# EAGLE board LEDDriver_v_5 (EAGLE 6.4)
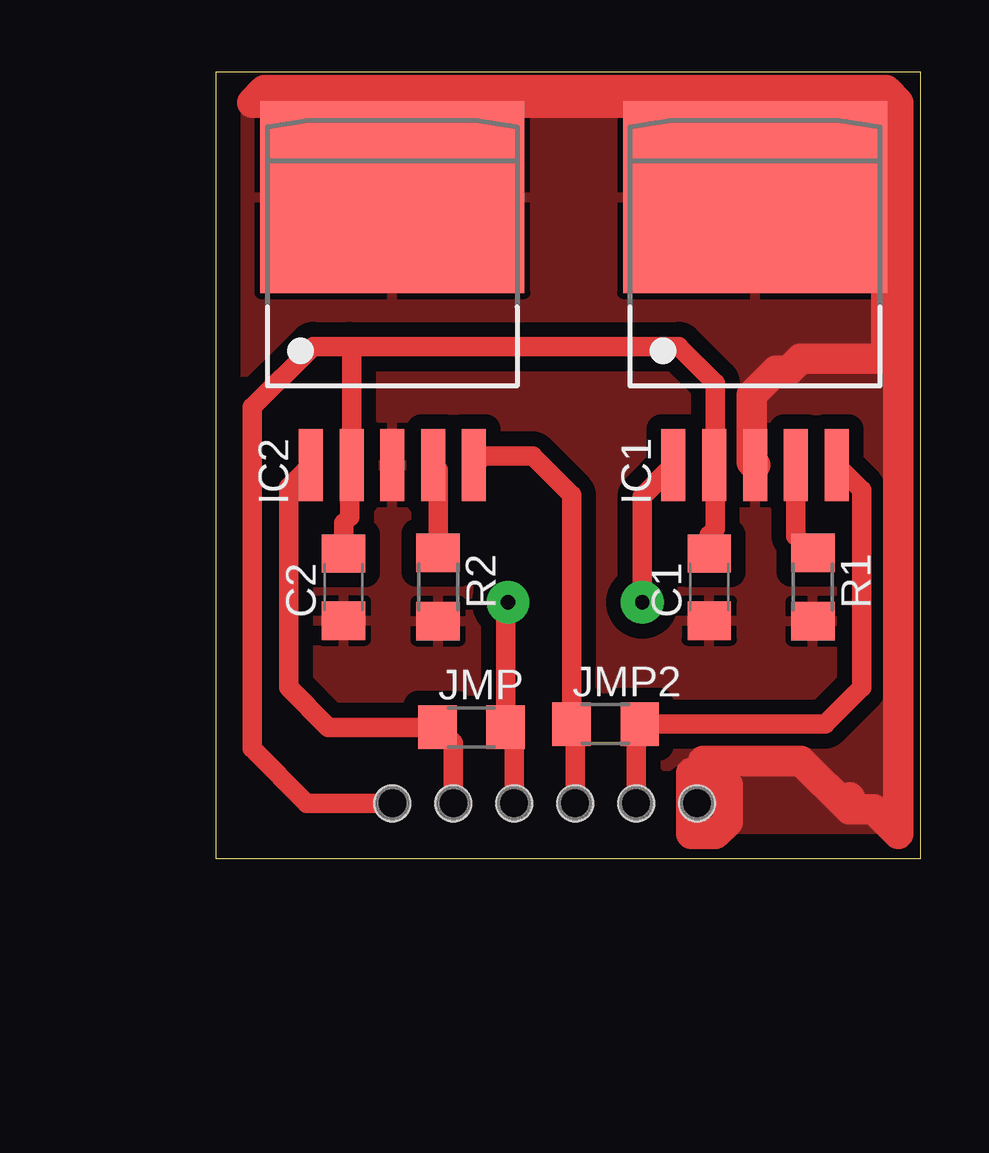
[diagram p0: board, top side]
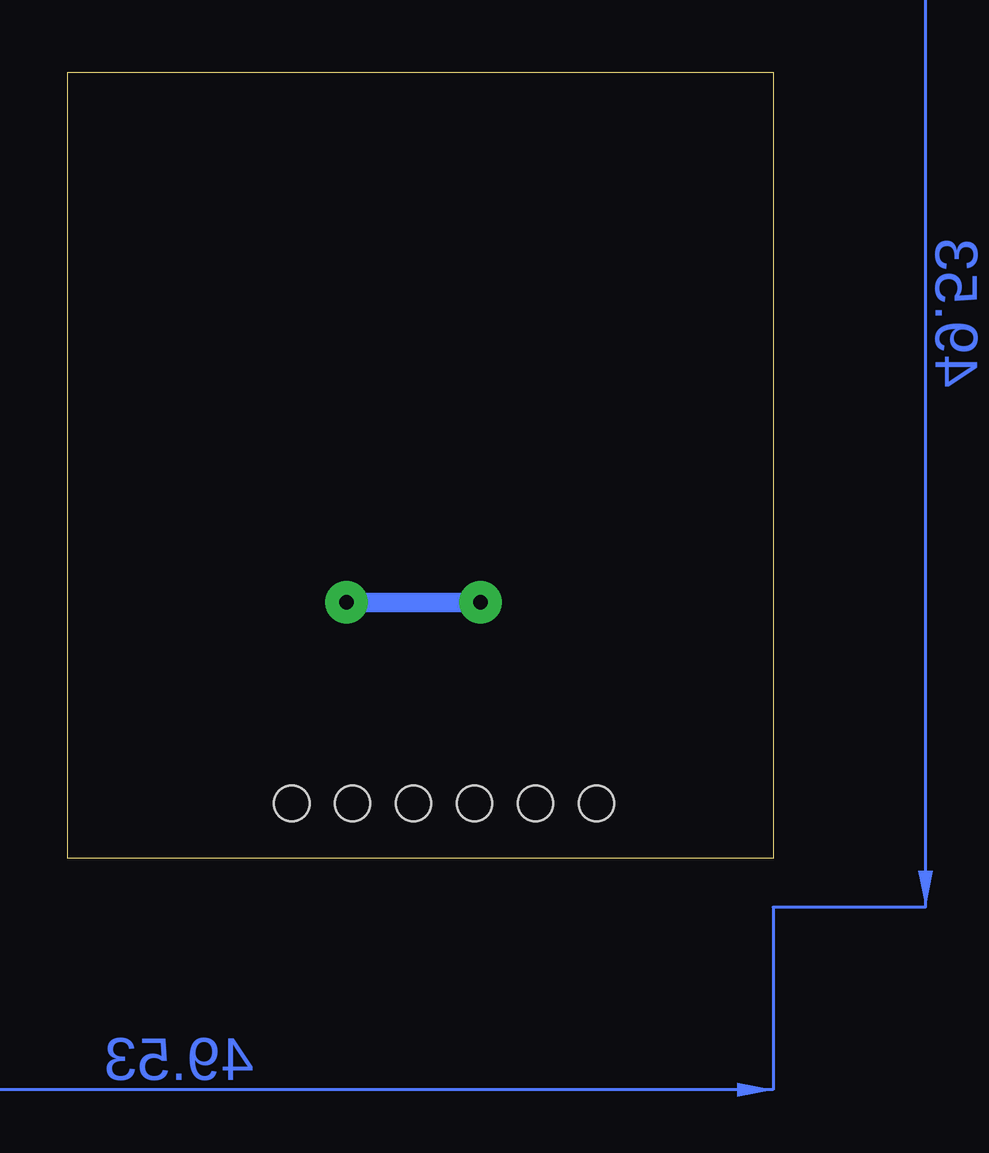
[diagram p1: board, bottom side, seen from below]

Size 29.39 x 32.76 mm. Coordinates in mm from the lower left corner, seen from the top.
Outline: 0,0 29.39,0 29.39,32.76 0,32.76 0,0
Copper layers (1*16): Top 0.035mm / dielectric 1.5mm / Bottom 0.035mm
Design rules "default *": minimum track width 10mil, minimum drill 24mil, track to track 15mil, track to pad 15mil, pad to pad 15mil, via to via 15mil, smd to smd 15mil, copper to edge 40mil, drill to drill 10mil, minimum pad ring 10mil, minimum via ring 8mil, stop-mask expansion 4mil, vias tented up to drill 0mil, thermal gap 10mil

## Footprints (pad centres in the part's own frame; a part is rotated, then mirrored left to right if it is on the bottom)
C1206 = smd 1.6 x 1.8: 1 -1.4,0; 2 1.4,0
TO263_5 = smd 1 x 3: 1 -3.4,-8; 2 -1.7,-8; 3 0,-8; 4 1.7,-8; 5 3.4,-8 | smd 11 x 8: TAB 0,3.175
R1206 = smd 1.6 x 1.803: 1 -1.422,0; 2 1.422,0
1X06_HOLES_ONLY = drill 0.889 pad 0.813: 1 0,0; 2 2.54,0; 3 5.08,0; 4 7.62,0; 5 10.16,0; 6 12.7,0 | hole 1.473: 0,0; 2.54,0; 5.08,0; 7.62,0; 10.16,0; 12.7,0

## Placement (x,y rotation side)
C1  [C1206]  20.57,11.3 90 top
C2  [C1206]  5.33,11.3 90 top
IC1  CAT4101  [TO263_5]  22.48,24.38 0 top
IC2  CAT4101  [TO263_5]  7.37,24.38 0 top
JMP  CH  [R1206]  10.67,5.46 0 top
JMP2  AMP  [R1206]  16.26,5.59 0 top
JP1  [1X06_HOLES_ONLY]  20.07,2.29 180 top
R1  [R1206]  24.89,11.3 270 top
R2  [R1206]  9.27,11.3 270 top

## Library data of the parts
C1 C2 JMP JMP2 R1 R2 = adafruit
IC1 IC2 = on-semiconductor; MPN: CAT4101TV-T75; OC_FARNELL: 1718452; OC_NEWARK: 08R5264
JP1 = SparkFun-Connectors

## Nets
+5V: C1.2 C2.2 IC1.2 IC2.2 JP1.6
GND: C1.1 C2.1 IC1.3 IC1.TAB IC2.3 IC2.TAB JP1.1 R1.2 R2.2
N$1: IC1.1 JMP.2 JP1.4
N$2: IC2.1 JMP.1 JP1.5
N$3: IC1.4 R1.1
N$4: IC2.5 JMP2.1 JP1.3
N$5: IC1.5 JMP2.2 JP1.2
N$8: IC2.4 R2.1

## Tracks (layer width: path | path; a pad name or v marks a point on that pad's centre or on a via)
+5V
  Top 0.813: JP1.6 3.81,2.29 1.52,4.57 1.52,18.8 4.06,21.34 5.59,21.34 | 5.59,21.34 19.3,21.34 20.83,19.81 20.83,16.43 IC1.2 20.83,16.34 20.83,13.72 20.57,13.46 C1.2 | 5.59,21.34 5.67,21.26 IC2.2 5.59,16.31 5.59,14.22 5.33,13.97 C2.2
GND
  Top 0.813: 26.16,2.29 26.42,2.54
  Top 1.27: 26.42,2.54 26.42,2.03 | 27.94,32 28.45,31.5 28.45,1.02 27.43,2.03 26.42,2.03 | 27.94,32 2.03,32 1.52,31.5 27.43,31.5 27.94,32 | 27.94,32 27.94,20.83 24.38,20.83 23.88,20.32 23.37,20.32 22.35,19.3 22.35,16.51 IC1.3 | JP1.1 20.07,3.3 19.81,3.56 19.81,1.02 20.83,1.02 21.34,1.52 21.34,3.05 20.32,4.06 24.38,4.06 26.42,2.03
  pour Top (isolate 0.61): 0,32.77 29.21,32.77 29.72,0 0,0
N$1  (via drill 0.6 pad 1.78)
  Top 0.813: JP1.4 12.45,5.1 JMP.2 12.09,10.57 v12.19,10.67 | v17.78,10.67 17.78,15.09 IC1.1
  Bottom 0.813: v12.19,10.67 v17.78,10.67
N$2
  Top 0.813: JP1.5 9.91,4.8 JMP.1 4.7,5.46 3.05,7.11 3.05,15.47 IC2.1
N$3
  Top 0.813: IC1.4 24.18,13.44 R1.1
N$4
  Top 0.813: 15.24,2.29 JP1.3 14.99,5.44 JMP2.1 14.83,15.14 13.21,16.76 11.15,16.76 IC2.5
N$5
  Top 0.813: JP1.2 17.53,5.44 JMP2.2 25.4,5.59 26.92,7.11 26.92,15.34 IC1.5
N$8
  Top 0.813: R2.1 9.27,16.18 IC2.4
(copper drawn outside any net)
  shapes: Bottom area x2